# Altium PCB PCB1.PcbDoc
Units mm, origin at the board's own origin, x right, y up, seen from the top; angles counter-clockwise.
Board outline 31.5 x 14.62 mm, 2 copper layers (Top Layer, Bottom Layer); 15 components, 13 nets, 43 pads, 23 vias.
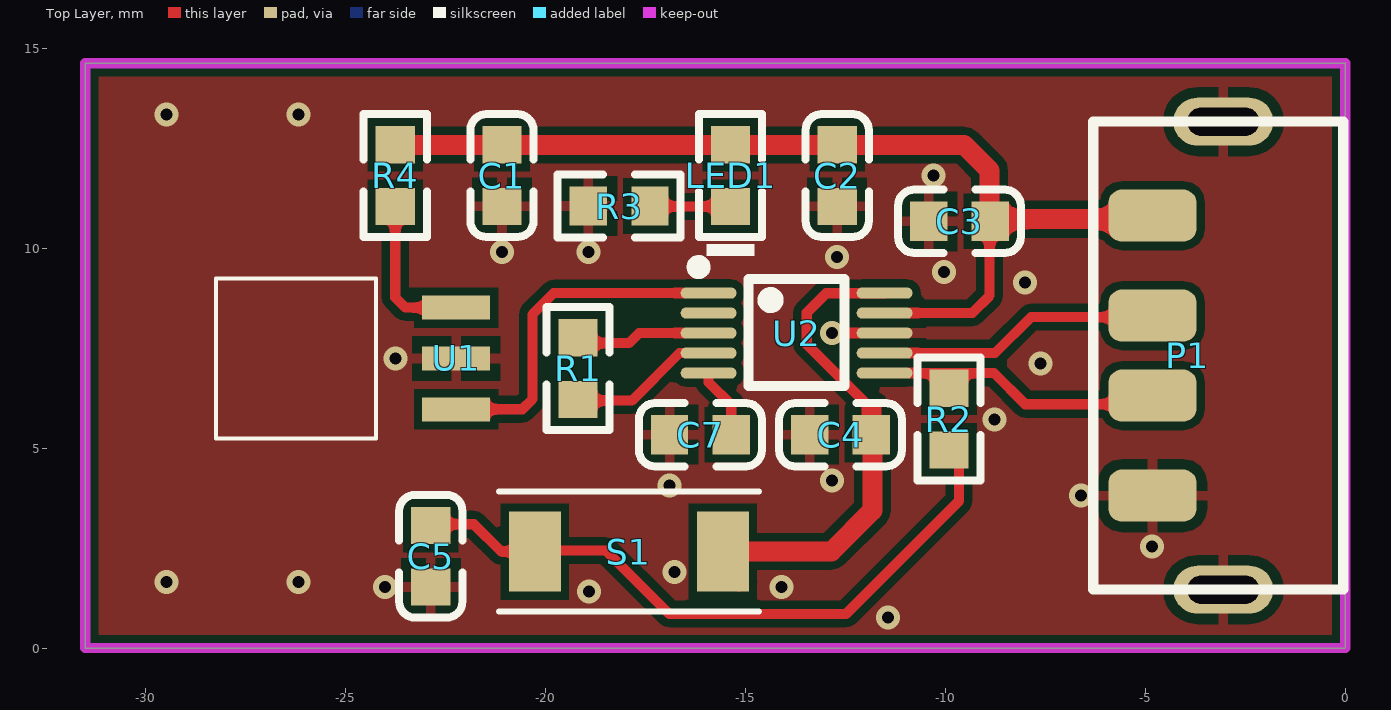
[diagram p0: Top Layer view]
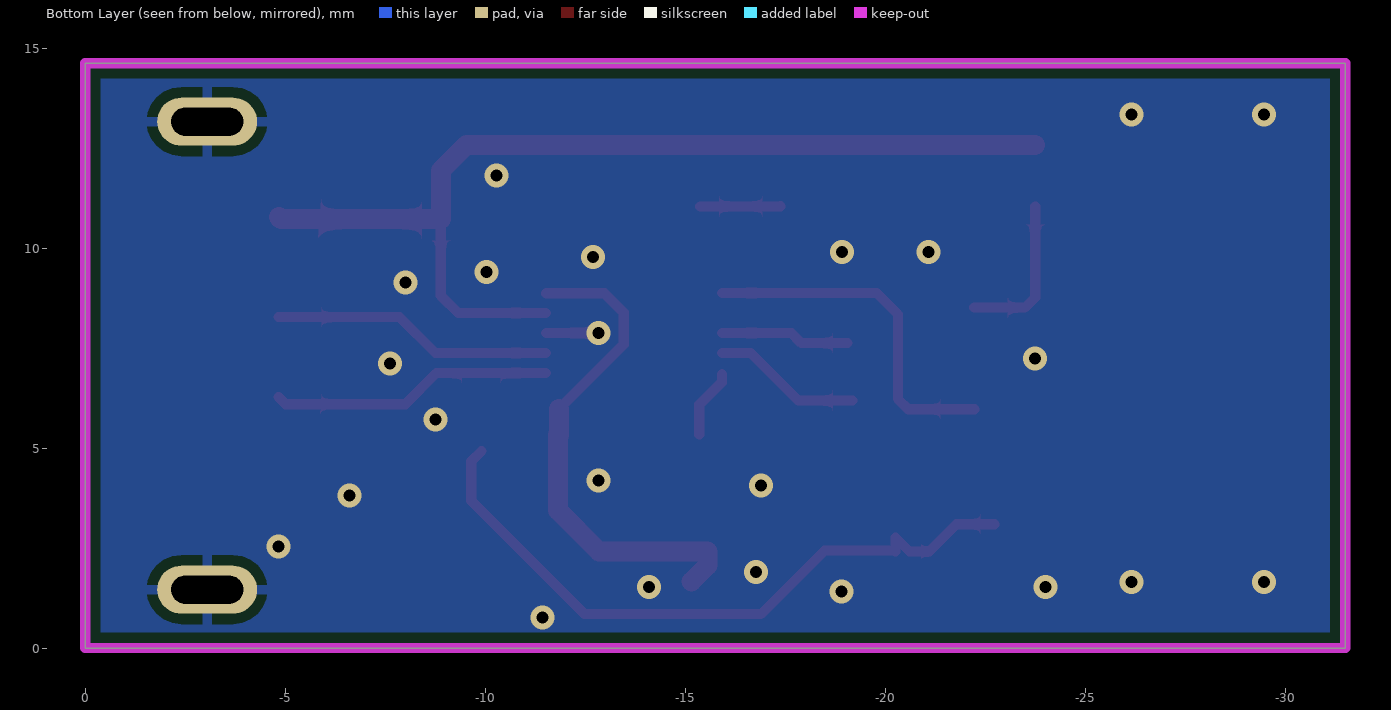
[diagram p1: Bottom Layer view, seen from below]
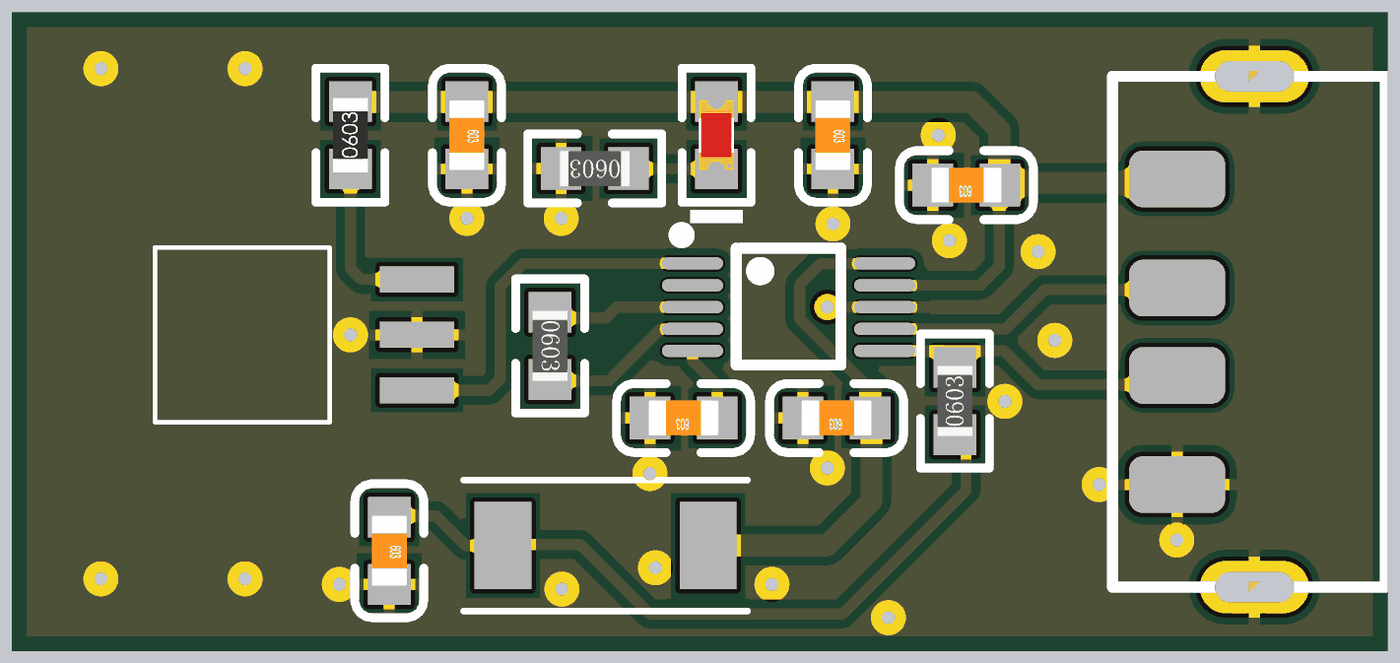
[diagram p2: 3D render of the assembled board from above, using the file's embedded part models]

## Layer stack, top to bottom
Top Solder: solder mask 0.0102, Solder Resist, Dk 3.5
Top Layer: signal copper 0.0356
Dielectric 1: dielectric 0.32, FR-4, Dk 4.8
Bottom Layer: signal copper 0.0356
Bottom Solder: solder mask 0.0102, Solder Resist, Dk 3.5

## Board outline
-31.5,0 0,0 0,14.62 -31.5,14.62

## Design rules (kind name [scope] priority, off if disabled: settings)
Clearance [All] p1: gap=0.2 ignorepadtopadclearanceinfootprint=TRUE
PolygonConnect [All] p1: thpad.connectstyle=Relief thpad.reliefconductorwidth=0.254 thpad.reliefentries=4 thpad.polygonreliefangle="90 Angle" thpad.airgapwidth=0.254 smdpad.connectstyle=Relief smdpad.reliefconductorwidth=0.254 smdpad.reliefentries=4 smdpad.polygonreliefangle="90 Angle" smdpad.airgapwidth=0.254 via.connectstyle=Direct via.reliefconductorwidth=0.254 via.reliefentries=4 via.polygonreliefangle="90 Angle" via.airgapwidth=0.254
RoutingVias [All] p1: holewidth=0.711 width=1.27 viastyle="Through Hole" minholewidth=0.3 minwidth=0.6 maxholewidth=0.711 maxwidth=1.27
SolderMaskExpansion [All] p1: expansion=0.102
Width [InNet('VDD33')] p1: maxlimit=0.5 minlimit=0.5 preferedwidth=0.5
30 further rules are at their usual default settings.

## Components (designator, comment, footprint, x,y, rotation, side; value= is the part's Value field where it differs from the comment)
C1 "0.1uF" 0603_C -21.082,11.811 r270 top value=100pF
C2 "10uF" 0603_C -12.7,11.811 r270 top value=100pF
C3 "0.1uF" 0603_C -9.644,10.668 r180 top value=100pF
C4 "0.1uF" 0603_C -12.617,5.334 r180 top value=100pF
C5 "NC/47pF" 0603_C -22.86,2.294 r270 top value=100pF
C7 "NC/0.1uF" 0603_C -16.121,5.334 r180 top value=100pF
LED1 "红色" 0603_LED_RED -15.367,11.811 r90 top
P1 "USB A型公头" USB_A型公头双面插 -3.048,7.31 r0 top
R1 "4.7k" 0603_R -19.177,6.985 r270 top value=1K
R2 "10K" 0603_R -9.906,5.723 r90 top value=1K
R3 "10K" 0603_R -18.153,11.049 r180 top value=1K
R4 "100Ω" 0603_R -23.749,11.811 r90 top value=1K
S1 "DOWNLOAD" Switch_3*4*2 -17.907,2.413 r180 top
U1 "LF0038" 4mm贴片红外接收头 -22.225,7.239 r0 top
U2 "CH552E" MSOP-10 -13.716,7.874 r0 top

## Footprints (in the part's own frame and the unit in brackets; to place one, negate y for a bottom-side part, rotate by r counter-clockwise, add the part's x,y. Pads: shape width x height; smd on the part's side, far side on the other; paste and mask are expansions set on the pad)
4mm贴片红外接收头 [mm]
  rect 1.7x0.6 smd: 1(0,-1.27) 2(0,0) 3(0,1.27)
  silkscreen extent -6,-2 -2,2
0603_C [mm]
  rect 0.93x0.98 smd: 1(-0.77,0) 2(0.77,0)
  silkscreen extent -1.53,-0.79 1.54,0.79, body extent -0.8,-0.4 0.8,0.4, height 0.3
0603_LED_RED [mm]
  rect 0.93x0.98 smd: 1(0.77,0) 2(-0.77,0)
  silkscreen extent -2.01,-0.79 1.54,0.79, body extent -0.8,-0.4 0.8,0.4, height 0.6
0603_R [mm]
  rect 0.93x0.98 smd: 1(-0.77,0) 2(0.77,0)
  silkscreen extent -1.53,-0.79 1.54,0.79, body extent -0.8,-0.4 0.8,0.4, height 0.45
MSOP-10 [mm]
  oval 1.4x0.28 smd mask+0.051: 1(-2.2,1) 2(-2.2,0.5) 3(-2.2,0) 4(-2.2,-0.5) 5(-2.2,-1) 6(2.2,-1) 7(2.2,-0.5) 8(2.2,0) 9(2.2,0.5) 10(2.2,1)
  silkscreen extent -2.6,-1.33 1.2,1.8
Switch_3*4*2 [mm] "无定位柱"
  rect 1.3x2 smd: 1(-2.35,0) 2(2.35,0)
  silkscreen extent -3.25,-1.5 3.25,1.5, body extent -2.5,-1.5 2.4,1.5, height 3
USB_A型公头双面插 [mm]
  oval 2.5x1.2 hole 0.7 slot 1.8 at 0 deg: 0(0,-5.85) 0(0,5.85)
  rrect50% 2.2x1.3 smd: 1(-1.77,-3.5) 2(-1.77,-1) 3(-1.77,1) 4(-1.77,3.5)
  silkscreen extent -3.25,-5.85 3,5.85, body extent -0.65,-5.85 17.82,5.85, height 2.25

## Part data
C1 C2 C3 C4 C5 C7: library part Cap, LatestRevisionDate=17-Jul-2002, LatestRevisionNote="Re-released for DXP Platform.", PackageDescription="Radial Cap, Thru-Hole; 2 Leads; 0.3 in Pin Spacing", PackageReference=RAD-0.3, Published=8-Jun-2000, Publisher="Altium Limited"
LED1: library part LED_RED, LatestRevisionDate=08-Jul-2005, LatestRevisionNote="Mech Layer 1 removed.", PackageDescription="LED; 2 Leads", PackageReference=LED-0, Published=8-Jun-2000, Publisher="Altium Limited"
R1 R2 R3 R4: library part Res, "电阻", LatestRevisionDate=17-Jul-2002, LatestRevisionNote="Re-released for DXP Platform.", PackageDescription="Axial Device, Thru-Hole; 2 Leads; 0.4 in Pin Spacing", PackageReference=AXIAL-0.4, Published=8-Jun-2000, Publisher="Altium Limited"
S1: library part Switch, LatestRevisionDate=17-Jul-2002, LatestRevisionNote="Re-released for DXP Platform.", PackageDescription="Switch; 2 Leads", PackageReference=SPST-2, Published=24-Mar-1999, Publisher="Altium Limited"
U2: library part "CH552E MSOP10", "10-bit"

## Via types
v1: diameter 0.6, hole 0.3, Top Layer to Bottom Layer, 23 vias

## Nets (pads, with @x,y where several pads share a name; then routed paths per layer and width w, separated by ;. In a path a pad name is that pad's centre, name@x,y a point inside that pad or via, vN(x,y) a via of type N, cw(c..) or ccw(c..) an arc to the next point about the centre after c; other vN are vias at no path point)
GND: C1.2 C2.2 C3.2 C4.2 C5.2 C7.2 P1.0 P1.1 R3.2 U1.2 U2.8 | length 1.3
  Top Layer w0.254: v1(-12.827,7.874) U2.8
  other v1: -11.43,0.762 -18.907,1.415 -24.003,1.524 -14.097,1.524 -29.464,1.651 -26.162,1.651 -16.764,1.905 -4.826,2.54 -6.604,3.81 -16.891,4.064 -12.827,4.191 -8.763,5.715 -7.62,7.112 -23.749,7.239 -8.001,9.144 -10.033,9.398 -12.7,9.779 -21.082,9.906 -18.923,9.906 -10.287,11.811 -29.464,13.335 -26.162,13.335
NetC5_1: C5.1 R2.1 S1.2 | length 17
  Top Layer w0.254: C5.1@-22.733,3.094 -21.784,3.094 -21.103,2.413 -20.607,2.413 -20.257,2.763 S1.2 -20.235,2.435 -18.481,2.435 -16.894,0.848 -12.487,0.848 -9.652,3.683 -9.652,4.669 R2.1@-9.906,4.923
NetLED1_2: LED1.2 R3.1 | length 2
  Top Layer w0.254: R3.1 -17.375,11.041 LED1.2
NetR4_1: R4.1 U1.3 | length 3.9
  Top Layer w0.254: R4.1 -23.749,8.763 -23.495,8.509 U1.3
P14: U1.1 U2.1 | length 8.8
  Top Layer w0.254: U1.1 -20.574,5.969 -20.32,6.223 -20.32,8.341 -19.787,8.874 -17.907,8.874 U2.1
P15: U2.2
P16: R1.1 U2.3 | length 3.2
  Top Layer w0.254: R1.1@-19.05,7.623 -17.904,7.623 -17.653,7.874 U2.3
P17: R1.2 U2.4 | length 3.8
  Top Layer w0.254: R1.2@-19.177,6.185 -17.83,6.185 -16.641,7.374 U2.4
P36: P1.2 R2.2 U2.6 | length 7.1
  Top Layer w0.254: U2.6 -8.779,6.874 -8.001,6.096 -5.015,6.096 P1.2@-4.839,6.272
P37: P1.3 U2.7 | length 7
  Top Layer w0.254: U2.7 -8.755,7.374 -7.857,8.272 P1.3@-4.839,8.272
RST: C7.1 U2.5 | length 1.8
  Top Layer w0.254: U2.5@-15.916,6.853 -15.916,6.645 -15.351,6.08 C7.1
VCC: C1.1 C2.1 C3.1 LED1.1 P1.4 R4.2 U2.9 | length 25.1
  Top Layer w0.254: U2.9 -9.325,8.374 -8.89,8.809 C3.1@-8.89,10.719
  Top Layer w0.5: R4.2@-23.749,12.574 -9.526,12.574 -8.89,11.938 -8.89,10.719 -4.891,10.719 P1.4@-4.839,10.772
VDD33: C4.1 S1.1 U2.10 | length 13.3
  Top Layer w0.254: S1.1 S1.1@-15.541,2.397 ; -11.847,5.98 -13.462,7.595 -13.462,8.382 -12.975,8.869 -11.521,8.869 U2.10
  Top Layer w0.5: S1.1@-15.157,1.663 -15.557,2.063 S1.1 -12.845,2.413 ; -13.208,2.413 -12.845,2.413 ; C4.1@-11.847,5.309 C4.1 -11.847,5.98 ; C4.1@-11.817,5.334 -11.817,3.441 -12.845,2.413

## Polygon pours and split planes (outlines as drawn)
no net on Bottom Layer "Bottom Layer-No Net 1" (solid, pour order 4): 0,14.62
no net on Bottom Layer "Bottom Layer-No Net" (solid, pour order 0): -14.097,8.763
GND on Bottom Layer "Bottom Layer-No Net" (solid, remove dead copper, pour order 20): -31.5,14.62 0,14.62 0,0 -31.5,0
GND on Top Layer "Bottom Layer-No Net" (solid, remove dead copper, pour order 22): -31.5,14.62 0,14.62 0,0 -31.5,0

## Keep-outs
Keep-Out Layer:
  the board outline again, w0.254

## Silkscreen, mask and mechanical layers (free items; w line width, h text height)
Mechanical 1:
  lines w0.21: -16.88,14.62 0,14.62 ; 0,14.62 0,0 -31.496,0 -31.5,0.004 -31.5,14.62 0,14.62